# Altium PCB mag_pos.PcbDoc
Units mm, origin at the board's own origin, x right, y up, seen from the top; angles counter-clockwise.
Board outline 14 x 13.92 mm, 4 copper layers (Top Layer, Layer 1, Layer 2, Bottom Layer), stack 0.961 mm thick; 35 components, 28 nets, 122 pads, 26 vias.
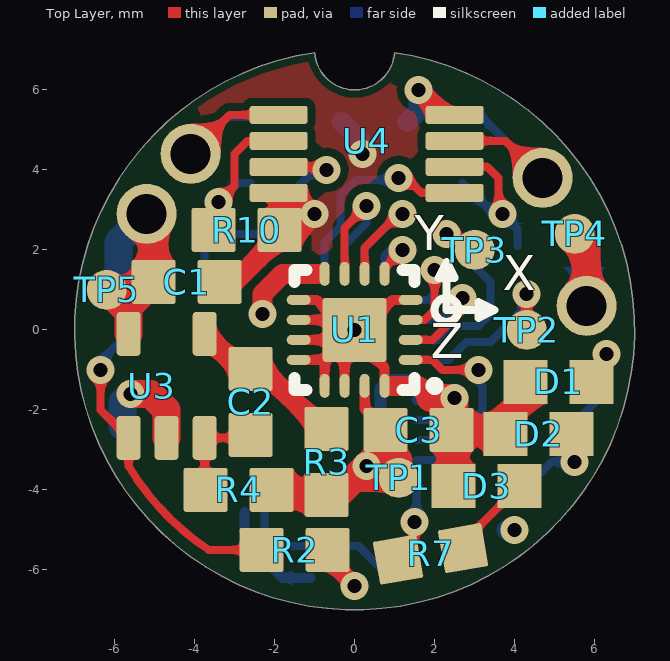
[diagram p0: Top Layer view]
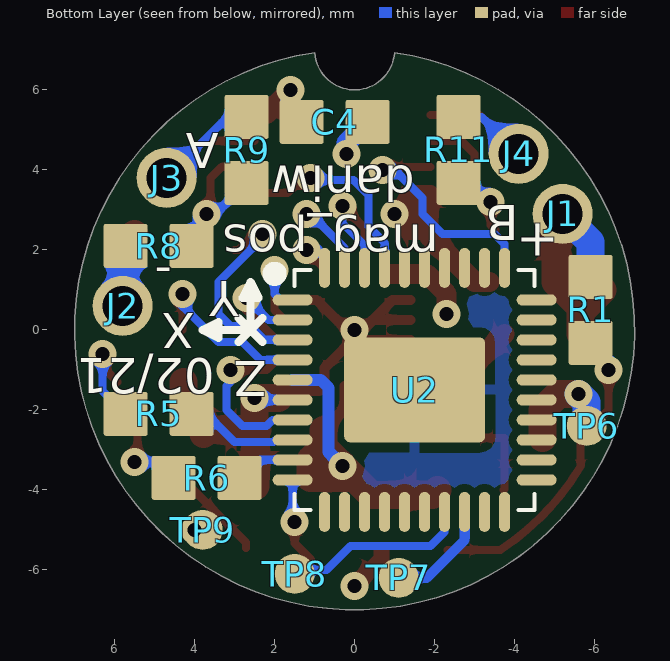
[diagram p1: Bottom Layer view, seen from below]
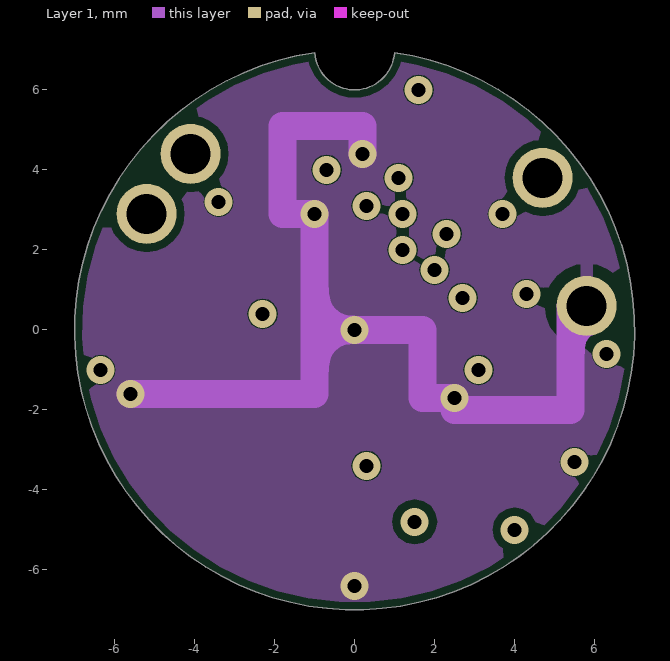
[diagram p2: Layer 1]
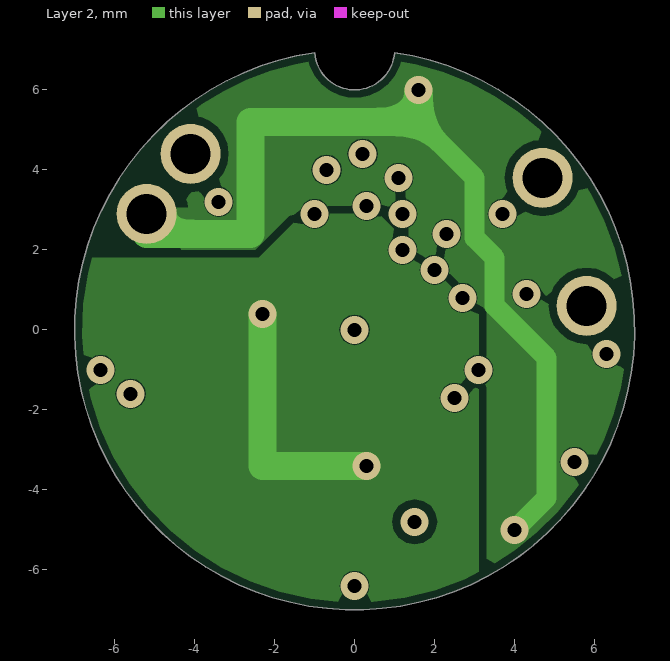
[diagram p3: Layer 2]

## Layer stack, top to bottom
Top Solder: solder mask 0.0102, Solder Resist, Dk 3.5
Top Layer: signal copper 0.0356
Dielectric 2: prepreg 0.11, PP-006, Dk 4.1
Layer 1: signal copper 0.035
Dielectric 1: dielectric 0.6, FR-4, Dk 4.8
Layer 2: signal copper 0.035
Dielectric 3: prepreg 0.11, PP-006, Dk 4.1
Bottom Layer: signal copper 0.0356
Bottom Solder: solder mask 0.0102, Solder Resist, Dk 3.5

## Board outline
-0.997,6.929 ccw(c0,0) 0.997,6.929 cw(c0,7)

## Design rules (kind name [scope] priority, off if disabled: settings)
Clearance [All] p1: gap=0.2 ignorepadtopadclearanceinfootprint=FALSE except(0: Arc-Hole Track-Hole SMDPad-Hole THPad-Hole Via-Hole Fill-Hole Poly-Hole Region-Hole Text-Hole)
ComponentClearance [All] p1: gap=0.2 collisioncheckmode=3 verticalgap=0.2 showdistances=FALSE
HoleSize [All] p1: absolutevalues=TRUE maxlimit=3.2 minlimit=0.3 maxpercent=80.000 minpercent=20.000
HoleToHoleClearance [All] p1: gap=0.3 allowstackedmicrovias=TRUE
MinimumAnnularRing [All] p1: minimumring=0.15
MinimumSolderMaskSliver [All] p1: minsoldermaskwidth=0.1
PolygonConnect [All] p1: thpad.connectstyle=Relief thpad.reliefconductorwidth=0.3 thpad.reliefentries=4 thpad.polygonreliefangle="90 Angle" thpad.airgapwidth=0.3 smdpad.connectstyle=Relief smdpad.reliefconductorwidth=0.25 smdpad.reliefentries=4 smdpad.polygonreliefangle="90 Angle" smdpad.airgapwidth=0.25 via.connectstyle=Direct via.reliefconductorwidth=0.254 via.reliefentries=4 via.polygonreliefangle="90 Angle" via.airgapwidth=0.254
RoutingVias [All] p1: holewidth=0.35 width=0.7 viastyle="Through Hole" minholewidth=0.3 minwidth=0.65 maxholewidth=0.5 maxwidth=3
SilkToSilkClearance [All] p1: silktosilkclearance=0.1
SilkToSolderMaskClearance [IsPad] p1: minsilkscreentomaskgap=0.15 clearancetoexposedcopper=TRUE
SolderMaskExpansion SolderMaskExpansion_Via [IsVia] p1: expansion=0.102 istentingtop=TRUE
SolderMaskExpansion [All] p2: expansion=0.05 istentingtop=FALSE
Width [All] p1: maxlimit=0.7 minlimit=0.2 preferedwidth=0.2 minimp=50.000000 maximp=50.000000 favimp=50.000000
24 further rules are at their usual default settings.

## Components (designator, comment, footprint, x,y, rotation, side; value= is the part's Value field where it differs from the comment)
C1 "1u" C_0603_S -4.2,1.2 r0 top
C2 "100p" C_0603_S -2.6,-1.8 r270 top
C3 "1u" C_0603_S 1.6,-2.5 r0 top
C4 "1u" C_0603_S 0.5,5.2 r180 bottom
D1 "LED" LED_0603_S_RED 5.1,-1.3 r0 top
D2 "LED" LED_0603_S_GREEN 4.6,-2.6 r0 top
D3 "LED" LED_0603_S_BLUE 3.3,-3.9 r0 top
J1 "+5V" WIRE_1MM_1.5MM_THT -5.2,2.9 r180 bottom
J2 "GND" WIRE_1MM_1.5MM_THT 5.8,0.6 r180 bottom
J3 "A" WIRE_1MM_1.5MM_THT 4.7,3.8 r180 bottom
J4 "B" WIRE_1MM_1.5MM_THT -4.1,4.4 r180 bottom
R1 "4M7" R_0603_S -5.9,0.5 r270 bottom
R2 "9M1" R_0603_S -1.5,-5.5 r0 top
R3 "10" R_0603_S -0.7,-3.3 r270 top
R4 "100" R_0603_S -2.9,-4 r0 top
R5 "100" R_0603_S 4.9,-2.1 r180 bottom
R6 "100" R_0603_S 3.7,-3.7 r180 bottom
R7 "100" R_0603_S 1.9,-5.6 r190 top
R8 "9M1" R_0603_S 4.9,2.1 r0 bottom
R9 "4M7" R_0603_S 2.7,4.5 r270 bottom
R10 "9M1" R_0603_S -2.7,2.5 r0 top
R11 "4M7" R_0603_S -2.6,4.5 r270 bottom
TP1 "VCC" TP_SMD_1MM 1.1,-3.7 r90 top
TP2 "RST" TP_SMD_1MM 4.3,0 r0 top
TP3 "TEST" TP_SMD_1MM 3,2 r0 top
TP4 "GND" TP_SMD_1MM 5.5,2.4 r90 top
TP5 "+5V" TP_SMD_1MM -6.2,1 r90 top
TP6 "GND" TP_SMD_1MM -5.8,-2.4 r90 bottom
TP7 "RX" TP_SMD_1MM -1.1,-6.2 r180 bottom
TP8 "TX" TP_SMD_1MM 1.5,-6.1 r180 bottom
TP9 "+5V" TP_SMD_1MM 3.8,-5 r0 bottom
U1 "MLX90393ELW-AWA-011" QFN50P300X300X100-16 0,0 r180 top
U2 "MSP430FR2355TRHA" QFN50P600X600X100-40 -1.5,-1.5 r180 bottom
U3 "LMV611MF" SOT23-5_1.45 -4.7,-1.4 r90 top
U4 "TLV522DGK" SOP65P500X300X110-8 0.3,4.4 r0 top

## Footprints (in the part's own frame and the unit in brackets; to place one, negate y for a bottom-side part, rotate by r counter-clockwise, add the part's x,y. Pads: shape width x height; smd on the part's side, far side on the other; paste and mask are expansions set on the pad)
C_0603_S [mm]
  rrect10% 1.1x1.1 smd: 1(-0.825,0) 2(0.825,0)
  body extent -0.8,-0.4 0.8,0.4, height 0.8
LED_0603_S_BLUE [mm]
  rect 1.1x1.1 smd: A(0.825,0) K(-0.825,0)
  body extent -0.8,-0.4 0.8,0.4, height 1.25
LED_0603_S_GREEN [mm]
  rect 1.1x1.1 smd: A(0.825,0) K(-0.825,0)
  body extent -0.8,-0.4 0.8,0.4, height 1.25
LED_0603_S_RED [mm]
  rect 1.1x1.1 smd: A(0.825,0) K(-0.825,0)
  body extent -0.8,-0.4 0.8,0.4, height 1.25
QFN50P300X300X100-16 [mm] "Quad flat no-lead package - 16Pin - 0.5mm spacing - 1mm height"
  oval 0.6x0.25 smd: 1(-1.4,0.75) 2(-1.4,0.25) 3(-1.4,-0.25) 4(-1.4,-0.75) 9(1.4,-0.75) 10(1.4,-0.25) 11(1.4,0.25) 12(1.4,0.75)
  oval 0.25x0.6 smd: 5(-0.75,-1.4) 6(-0.25,-1.4) 7(0.25,-1.4) 8(0.75,-1.4) 13(0.75,1.4) 14(0.25,1.4) 15(-0.25,1.4) 16(-0.75,1.4)
  rrect10% 1.6x1.6 smd paste-2: EP(0,0)
  silkscreen extent -2.1,-1.5 1.5,1.5, body extent -1.55,-1.55 1.55,1.55, height 1.01
QFN50P600X600X100-40 [mm] "Quad flad no-lead, 40 pin, 0.5mm spacing, 1.0mm height"
  oval 1x0.28 smd: 1(-3.05,2.25) 2(-3.05,1.75) 3(-3.05,1.25) 4(-3.05,0.75) 5(-3.05,0.25) 6(-3.05,-0.25) 7(-3.05,-0.75) 8(-3.05,-1.25) 9(-3.05,-1.75) 10(-3.05,-2.25) 21(3.05,-2.25) 22(3.05,-1.75) 23(3.05,-1.25) 24(3.05,-0.75) 25(3.05,-0.25) 26(3.05,0.25) 27(3.05,0.75) 28(3.05,1.25) 29(3.05,1.75) 30(3.05,2.25)
  oval 0.28x1 smd: 11(-2.25,-3.05) 12(-1.75,-3.05) 13(-1.25,-3.05) 14(-0.75,-3.05) 15(-0.25,-3.05) 16(0.25,-3.05) 17(0.75,-3.05) 18(1.25,-3.05) 19(1.75,-3.05) 20(2.25,-3.05) 31(2.25,3.05) 32(1.75,3.05) 33(1.25,3.05) 34(0.75,3.05) 35(0.25,3.05) 36(-0.25,3.05) 37(-0.75,3.05) 38(-1.25,3.05) 39(-1.75,3.05) 40(-2.25,3.05)
  rrect10% 3.52x2.62 smd paste-3: EP(0,0)
  silkscreen extent -3.6,-3 3,3, body extent -3,-3 3,3, height 1
R_0603_S [mm]
  rrect10% 1.1x1.1 smd: 1(-0.825,0) 2(0.825,0)
  body extent -0.8,-0.4 0.8,0.4, height 1.25
SOP65P500X300X110-8 [mm] "Small outline package, 0.65mm pitch, 8 pin, 1.1mm height (TI DGK0008A)"
  rrect30% 1.45x0.45 smd: 1(-2.2,0.975) 2(-2.2,0.325) 3(-2.2,-0.325) 4(-2.2,-0.975) 5(2.2,-0.975) 6(2.2,-0.325) 7(2.2,0.325) 8(2.2,0.975)
  round 0.4 on Top Overlay: 1(-1.9,1.6)
  body extent -2.45,-1.5 2.45,1.5, height 1.1
SOT23-5_1.45 [mm] "SOT23-5 1.45mm height (TI DVB0005A)"
  rrect30% 1.1x0.6 smd: 1(-1.3,0.95) 2(-1.3,0) 3(-1.3,-0.95) 4(1.3,-0.95) 5(1.3,0.95)
  round 0.4 on Top Overlay: 1(-0.8,1.7)
  body extent -1.4,-1.45 1.4,1.45, height 1.2
TP_SMD_1MM [mm] "Testpoint SMD 1mm"
  round 1 smd: 1(0,0)
  body extent -0.5,-0.5 0.5,0.5, height 0.1
WIRE_1MM_1.5MM_THT [mm] "Wire with 1mm diameter, 1.5mm pad diameter"
  round 1.5 hole 1: 1(0,0)
  body extent -0.35,-0.35 0.35,0.35, height 3

## Part data
C1 C2 C3 C4: library part C
J1 J2 J3 J4: library part Wire_1MM, "1mm Wire", System=Connector
R1 R2 R3 R4 R5 R6 R7 R8 R9 R10 R11: library part R, "Normaler Widerstand"
TP1 TP2 TP3 TP4 TP5 TP6 TP7 TP8 TP9: library part TP_SMD_1mm, "Testpoint SMD 1mm"
U1: "Triaxis Magnetic Node, QFN16"
U2: "Mixed-Signal Microcontroller, 16Bit, 32kB FRAM, 4kB SRAM, QFN40"
U3: "LMV611 SOT-23-5 Single, 1.4-MHz, Low-Power, General-Purpose 1.8-V Operational Amplifier", Manufacturer=TI, HelpURL=https://www.ti.com/lit/ds/symlink/lmv611.pdf
U4: "TLV522 VSSOP-8 Dual Nanopower, 500nA, RRIO CMOS Operational Amplifier", Manufacturer=TI, HelpURL=https://www.ti.com/lit/ds/symlink/tlv522.pdf

## Via types
v1: diameter 0.7, hole 0.35, Top Layer to Bottom Layer, tented both sides, 26 vias

## Nets (pads, with @x,y where several pads share a name; then routed paths per layer and width w, separated by ;. In a path a pad name is that pad's centre, name@x,y a point inside that pad or via, vN(x,y) a via of type N, cw(c..) or ccw(c..) an arc to the next point about the centre after c; other vN are vias at no path point)
3V3_FB: C2.2 R4.1 U3.3 | length 2.5
  Top Layer w0.2: R4.1 -3.75,-3.975 U3.3 -2.675,-2.7 C2.2
3V3_Out: C2.1 R3.1 U3.4 | length 4
  Top Layer w0.5: U3.4 -2.875,-0.975 C2.1 -2.325,-0.975 -0.825,-2.475 R3.1
3V3_Ref: R1.2 R2.1 U3.1@-5.65,-2.7 | length 7.8
  Top Layer w0.2: v1(-6.35,-1) -6.35,-2 -5.65,-2.7 -5.65,-3.411 ccw(c0,0) -3.648,-5.5 R2.1
  Bottom Layer w0.2: v1(-6.35,-1) -6.35,-0.775 R1.2
+3V3: C3.1 R3.2 R4.2 TP1.1 U1.8 U1.15 U2.5 | length 18.9
  Top Layer w0.25: -0.9,1.4 U1.8 ; U1.15 0.25,-1.975 C3.1
  Top Layer w0.5: v1(-2.3,0.4) -2.3,0.9 -1.8,1.4 -0.9,1.4
  Top Layer w0.7: R4.2 -1.95,-4.125 R3.2 -0.425,-4.125 0,-3.7 ; C3.1 C3.1@0.775,-2.925 ; 0,-3.7 TP1.1 1.1,-3.25 C3.1@0.775,-2.925 ; 0,-3.7 v1(0.3,-3.4) C3.1@0.775,-2.925
  Layer 2 w0.7: v1(-2.3,0.4) -2.3,-3.4 v1(0.3,-3.4)
  Bottom Layer w0.3: v1(0.3,-3.4) 0.65,-3.05 0.65,-1.45 0.85,-1.25 U2.5
+5V: C1.1 C4.1 J1.1 R1.1 TP5.1 TP9.1 U3.5 U4.8 | length 32
  Top Layer w0.4: U4.8@2.2,5.4 2.225,5.375 U4.8
  Top Layer w0.5: v1(1.6,6) U4.8@2.2,5.4
  Top Layer w0.7: U3.5 -5.65,0.45 ; J1.1 -5.025,2.725 C1.1 C1.1@-5.225,1 ; -5.65,0.45 TP5.1 C1.1@-5.225,1 ; -5.65,0.45 -5.65,0.575 C1.1@-5.225,1
  Layer 2 w0.5: 1.6,5.2 3,3.8 3,2.3 3.5,1.8 3.5,0.6 4.8,-0.7 4.8,-4.2 v1(4,-5)
  Layer 2 w0.7: J1.1 -5.2,2.4 -2.6,2.4 -2.6,5.2 1.6,5.2 v1(1.6,6)
  Bottom Layer w0.5: C4.1 1.6,5.475 v1(1.6,6) ; TP9.1 v1(4,-5)
  Bottom Layer w0.7: R1.1 -5.9,2.2 J1.1
A: J3.1 R9.1 U4.7 | length 5.2
  Top Layer w0.2: U4.7 3.775,4.725 J3.1
  Bottom Layer w0.2: R9.1 3.175,5.325 J3.1
A_FB: R8.1 R9.2 U4.6 | length 4.4
  Top Layer w0.2: U4.6 3.325,4.075 3.6,3.8 3.6,3 v1(3.7,2.9)
  Bottom Layer w0.2: R9.2 3.2,3.175 3.475,2.9 v1(3.7,2.9) 4.075,2.525 R8.1
A_uC: U2.37 U4.5 | length 5.2
  Top Layer w0.2: v1(1.1,3.8) 1.3,3.8 1.675,3.425 U4.5
  Bottom Layer w0.2: U2.37 -0.75,2.181 -0.35,2.581 -0.35,3.369 0.031,3.75 0.85,3.75 0.9,3.8 v1(1.1,3.8)
B: J4.1 R11.1 U4.1@-1.9,5.375 | length 4.5
  Top Layer w0.2: J4.1 -3.125,5.375 U4.1@-1.9,5.375
  Bottom Layer w0.2: J4.1 -3.175,5.325 R11.1
B_FB: R10.1 R11.2 U4.2 | length 4.3
  Top Layer w0.2: R10.1 -3.4,2.625 v1(-3.4,3.2) -3,3.6 -3,4.4 -2.675,4.725 U4.2
  Bottom Layer w0.2: v1(-3.4,3.2) -2.925,3.675 R11.2
B_uC: U2.31 U4.3 | length 5.9
  Top Layer w0.2: U4.3 -0.775,4.075 v1(-0.7,4)
  Bottom Layer w0.2: U2.31 -3.75,2.15 -3.5,2.4 -2.2,2.4 -1.7,2.9 -1.7,3.3 -1,4 v1(-0.7,4)
CS: U1.2 U2.2 | length 3.3
  Top Layer w0.2: U1.2 1.95,-0.25 2.7,0.5 v1(2.7,0.8)
  Bottom Layer w0.2: U2.2 2.15,0.25 v1(2.7,0.8)
GND: C1.2 C3.2 C4.2 D1.K D2.K D3.K J2.1 R2.2 R8.2 R10.2 TP4.1 TP6.1 U1.4 U1.9 U1.10 U1.11 U1.12 U1.13 U1.14 U1.16 U1.EP U2.6 U2.EP U3.2 U4.4 | length 60.3
  Top Layer w0.25: U1.12 U1.EP@-0.75,-0.75 ; U1.11 U1.EP@-0.25,-0.25 ; U1.10 U1.EP@-0.45,0.25 ; U1.9 -0.95,0.75 U1.EP@-0.45,0.25 ; U1.13 U1.EP@-0.75,-0.75 ; U1.14 U1.EP@-0.25,-0.25 ; 0.9,-1.4 U1.16 0.75,-0.95 0,-0.2 v1(0,0) ; U1.4 0.95,0.75 0.2,0 v1(0,0) ; U1.EP@-0.75,-0.75 U1.EP@-0.25,-0.25 ; U1.EP@-0.45,0.25 -0.2,0 v1(0,0) ; U1.EP@-0.25,-0.25 v1(0,0)
  Top Layer w0.4: R10.2 -1.9,2.525 U4.4 ; R10.2@-1.375,2.9 U4.4 ; v1(-1,2.9) -1.525,3.425 U4.4 ; R2.2 -0.675,-5.725 v1(0,-6.4)
  Top Layer w0.5: C1.2 -3,1.2 -1.875,2.325 R10.2 ; 0.9,-1.4 1.6,-1.4 1.9,-1.7 ; R10.2 -1.4,2.5 v1(-1,2.9) -1.375,2.9 -1.475,2.9 R10.2
  Top Layer w0.7: v1(-5.6,-1.6) -5.1,-1.6 -4.7,-2 U3.2 ; 1.9,-1.7 v1(2.5,-1.7) 2.5,-2.425 C3.2 ; D3.K 2.475,-2.55 C3.2 ; D1.K 4.275,-1.725 3.775,-2.225 D2.K 3.675,-2.5 C3.2 ; TP4.1 5.8,2.1 J2.1
  Layer 1 w0.7: v1(-5.6,-1.6) -1,-1.6 -1,0 ; v1(0.2,4.4) 0.2,5.1 -1.8,5.1 -1.8,2.9 v1(-1,2.9) -1,0 ; J2.1 5.4,0.6 5.4,-2 2.5,-2 v1(2.5,-1.7) 1.7,-1.7 1.7,0 v1(0,0) -1,0
  Bottom Layer w0.25: U2.6 2.45,-1.75 v1(2.5,-1.7)
  Bottom Layer w0.5: C4.2 0.2,4.675 v1(0.2,4.4)
  Bottom Layer w0.7: TP6.1 -5.8,-1.8 v1(-5.6,-1.6) ; R8.2 5.8,2.025 J2.1
INT: U1.1 U2.7 | length 4.7
  Top Layer w0.2: U1.1 1.95,-0.75 2.2,-1 v1(3.1,-1)
  Bottom Layer w0.2: U2.7 2.05,-2.25 2.2,-2.4 2.8,-2.4 3.2,-2 3.2,-1.4 3.1,-1.3 v1(3.1,-1)
INTTRIG: U1.7 U2.38 | length 3.7
  Top Layer w0.2: U1.7 -0.25,2.55 v1(0.3,3.1)
  Bottom Layer w0.2: U2.38 -0.25,2.116 0.3,2.666 0.3,3.066 v1(0.3,3.1)
LED_Blue: R7.2 U2.10 | length 2.2
  Top Layer w0.2: R7.2 1.5,-5.331 v1(1.5,-4.8)
  Bottom Layer w0.2: v1(1.5,-4.8) 1.55,-4.75 U2.10
LED_Blue_R: D3.A R7.1 | length 2.1
  Top Layer w0.2: R7.1 2.712,-5.313 D3.A
LED_Green: R6.2 U2.9 | length 1.5
  Bottom Layer w0.2: U2.9 2.425,-3.25 R6.2
LED_Green_R: D2.A R6.1 | length 1.9
  Top Layer w0.2: D2.A 5.425,-3.225 v1(5.5,-3.3)
  Bottom Layer w0.2: R6.1 4.925,-3.3 v1(5.5,-3.3)
LED_Red: R5.2 U2.8 | length 2.8
  Bottom Layer w0.2: U2.8 1.984,-2.75 2.034,-2.8 3,-2.8 3.7,-2.1 R5.2
LED_Red_R: D1.A R5.1 | length 2.6
  Top Layer w0.2: D1.A 6.3,-0.925 v1(6.3,-0.6)
  Bottom Layer w0.2: R5.1 6.3,-1.525 v1(6.3,-0.6)
MISO: U1.6 U2.39 | length 3.8
  Top Layer w0.2: U1.6 0.25,2.05 1.1,2.9 v1(1.2,2.9)
  Bottom Layer w0.2: U2.39 0.25,2.05 1.1,2.9 v1(1.2,2.9)
MOSI: U1.5 U2.40 | length 1.6
  Top Layer w0.2: U1.5 0.75,1.55 v1(1.2,2)
  Bottom Layer w0.2: U2.40 0.75,1.85 0.9,2 v1(1.2,2)
RX: TP7.1 U2.18 | length 2.7
  Bottom Layer w0.25: U2.18 -2.75,-5.25 -1.8,-6.2 TP7.1
SBWTCK: TP3.1 U2.3 | length 5.4
  Top Layer w0.2: v1(2.3,2.4) 2.5,2.4 2.9,2 TP3.1
  Bottom Layer w0.2: U2.3 2.25,-0.25 2.6,0.1 3.1,0.1 3.4,0.4 3.4,1.2 2.3,2.3 v1(2.3,2.4)
SBWTDIO: TP2.1 U2.4 | length 4.5
  Top Layer w0.2: TP2.1 v1(4.3,0.9)
  Bottom Layer w0.2: U2.4 2.35,-0.75 2.8,-0.3 3.4,-0.3 4.3,0.6 v1(4.3,0.9)
SCLK: U1.3 U2.1 | length 2.8
  Top Layer w0.2: U1.3 1.75,0.25 2,0.5 v1(2,1.5)
  Bottom Layer w0.2: U2.1 1.85,0.75 2,0.9 v1(2,1.5)
TX: TP8.1 U2.17 | length 4.6
  Bottom Layer w0.2: U2.17 -2.25,-5.05 -1.9,-5.4 0.1,-5.4 0.7,-6 TP8.1@1.5,-6
pads on no net: U2.11 U2.12 U2.13 U2.14 U2.15 U2.16 U2.19 U2.20 U2.21 U2.22 U2.23 U2.24 U2.25 U2.26 U2.27 U2.28 U2.29 U2.30 U2.32 U2.33 U2.34 U2.35 U2.36 U3.1@-6.4,-2.2 U4.1@-1.6,6

## Polygon pours and split planes (outlines as drawn)
+5V on Layer 2 "+5V_L03_P010" (solid, remove dead copper, pour order 10): -6.557,1.8 -2.4,1.8 -1.3,2.9 0.6,2.9 3.1,0.4 3.1,-6.052 ccw(c0,0) 1.162,6.7 cw(c0,7) -1.162,6.7 ccw(c0,0)
+3V3 on Layer 2 "+3V3_L03_P009" (solid, remove dead copper, pour order 9): -6.557,1.8 ccw(c0,0) 3.1,-6.052 3.1,0.4 0.6,2.9 -1.3,2.9 -2.4,1.8
GND on Layer 1 "GND_L02_P000" (solid, remove dead copper, pour order 0): -1.162,6.7 ccw(c0,0) 1.162,6.7 cw(c0,7)
GND on Bottom Layer "GND_L04_P002" (solid, remove dead copper, pour order 2): -1.162,6.7 ccw(c0,0) 1.162,6.7 cw(c0,7)
GND on Top Layer "GND_L01_P003" (solid, remove dead copper, pour order 3): -1.162,6.7 ccw(c0,0) 1.162,6.7 cw(c0,7)

## Silkscreen, mask and mechanical layers (free items; w line width, h text height)
Top Overlay:
  circle w0.2: c2.3,0.5 r0.3
  lines w0.2: 2.3,1.7 2.3,0.5 3.5,0.5 ; 2.3,1.7 2.1,1.3 2.5,1.3 2.3,1.7 ; 3.5,0.5 3.1,0.7 3.1,0.3 3.5,0.5
  text "Y" at 1.501,1.7 h1.5
  text "X" at 3.7,0.7 h1.5
  text "Z" at 1.9,-1 h1.5
Bottom Overlay:
  lines w0.2: 2.3,-0.3 2.9,0.3 ; 2.3,0.3 2.9,-0.3 ; 2.6,1.2 2.6,0 3.8,0 ; 2.6,1.2 2.4,0.8 2.8,0.8 2.6,1.2 ; 3.8,0 3.4,-0.2 3.4,0.2 3.8,0
  text "A" at 3.4,5.2 h1.5 r180
  text "daniw" at -1.5,4.385 h1.5 r180
  text "B" at -4.1,3.4 h1.5 r180
  text "mag_pos" at -2.099,2.918 h1.5 r180
  text "+" at -4.037,1.536 h1.6
  text "Y" at 2.901,1.5 h1.5 r180
  text "-" at 5,0.912 h1.5
  text "X" at 4,0.7 h1.5 r180
  text "02/21" at 3.5,-0.417 h1.5 r180
  text "Z" at 2.2,-0.5 h1.5 r180
Top Solder:
  lines w0.1: -0.95,6.986 ccw(c0,0) 0.95,6.986 cw(c0,7) -0.95,6.986
Bottom Solder:
  lines w0.1: -0.95,6.986 ccw(c0,7) 0.95,6.986 cw(c0,0) -0.95,6.986
Board:
  the board outline again, w0.1
Drill Drawing:
  lines w0.1: -6.557,1.8 ccw(c0,0) 3.1,-6.052 ; -6.557,1.8 cw(c0,0) -1.162,6.7 ccw(c0,7) 1.162,6.7 cw(c0,0) 3.1,-6.052 ; -6.557,1.8 -2.4,1.8 -1.3,2.9 0.6,2.9 3.1,0.4 3.1,-6.052
Top Assembly:
  lines w0.2: 2.475,-4.3 2.475,-3.5 ; 2.8,-4.3 2.8,-3.5 ; 3.775,-3 3.775,-2.2 ; 4.1,-3 4.1,-2.2 ; 4.125,-4.3 4.125,-3.5 ; 4.275,-1.7 4.275,-0.9 ; 4.3,-6.1 2.8,-4.6 2.3,-4.6 1.9,-4.2 ; 4.6,-1.7 4.6,-0.9 ; 5.425,-3 5.425,-2.2 ; 5.925,-1.7 5.925,-0.9 ; 6.3,5.2 3.6,2.5 ; 1.9,-4.2 2.2,-4.3 2,-4.5 1.9,-4.2 ; 3.6,2.5 3.9,2.6 3.7,2.8 3.6,2.5